# Altium PCB STM32F407VG_Pcb.PcbDoc
Units mil, origin at the board's own origin, x right, y up, seen from the top; angles counter-clockwise.
Board outline 6000 x 4000 mil, 2 copper layers (Top Layer, Bottom Layer); 121 components, 89 nets, 231 pads, 0 vias.
Unrouted connection lines stored in the file: 3.
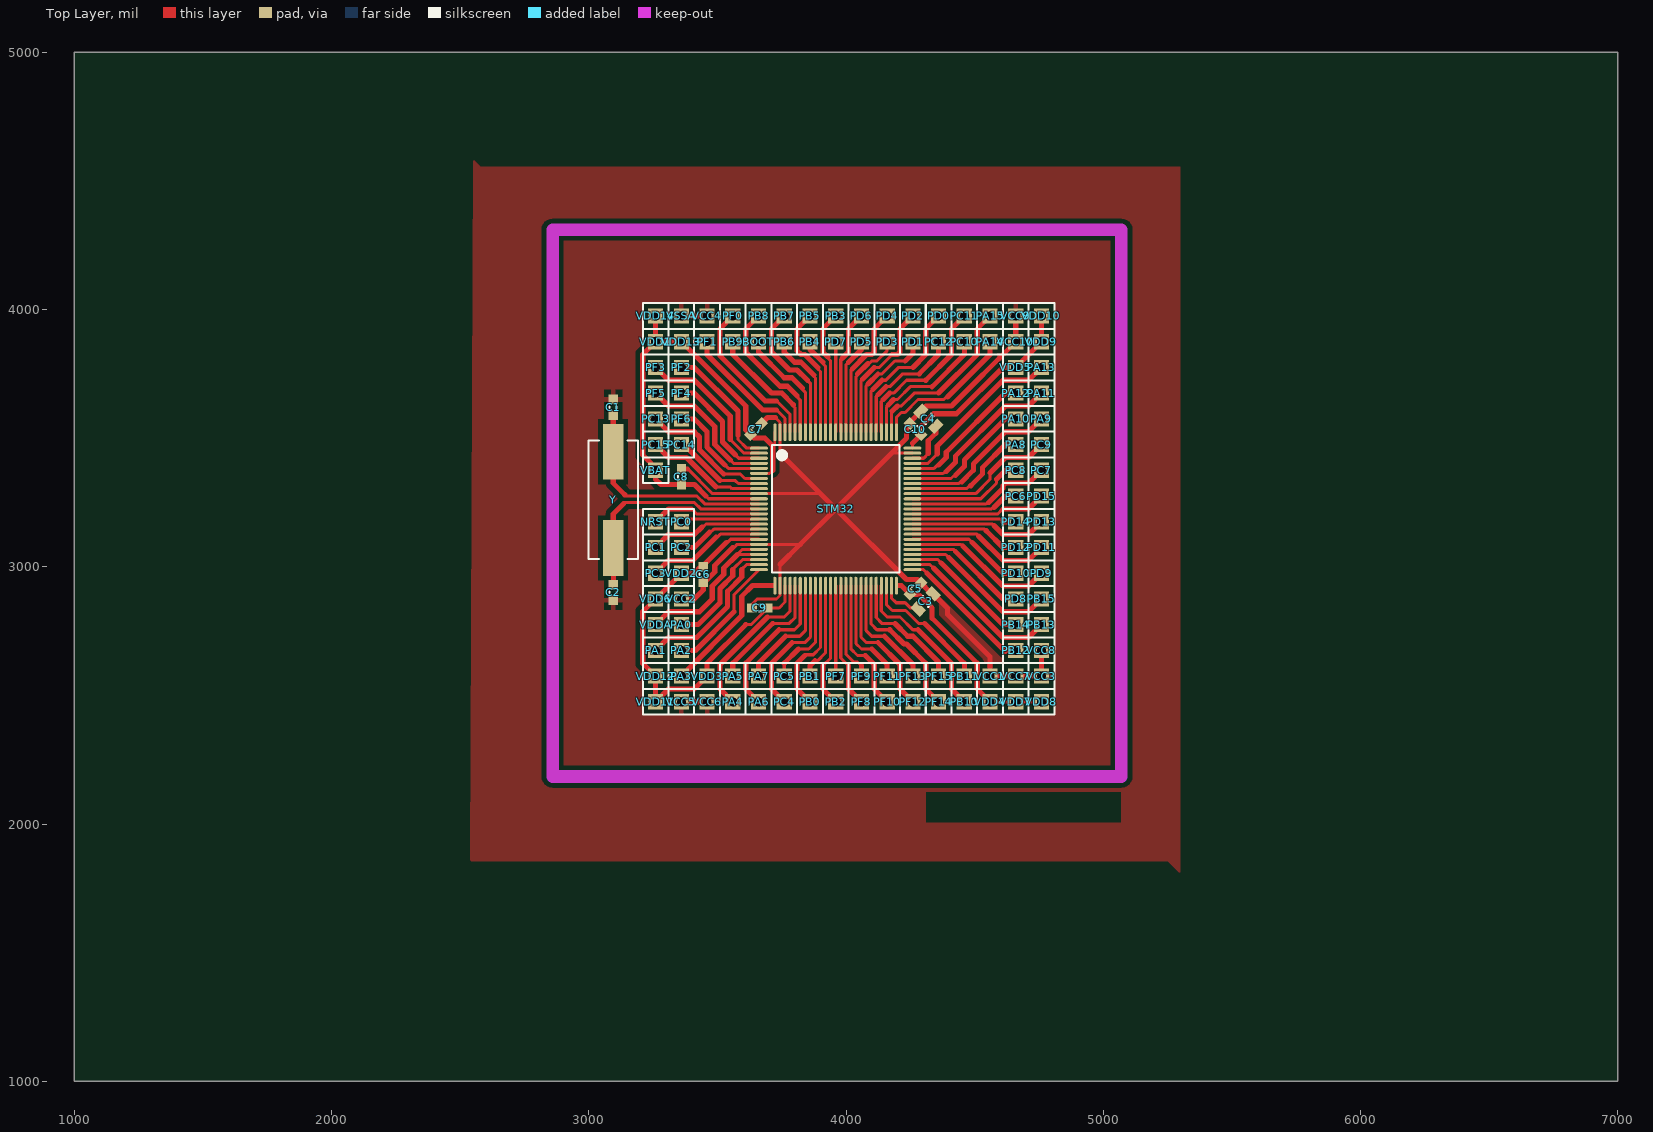
[diagram p0: Top Layer view]
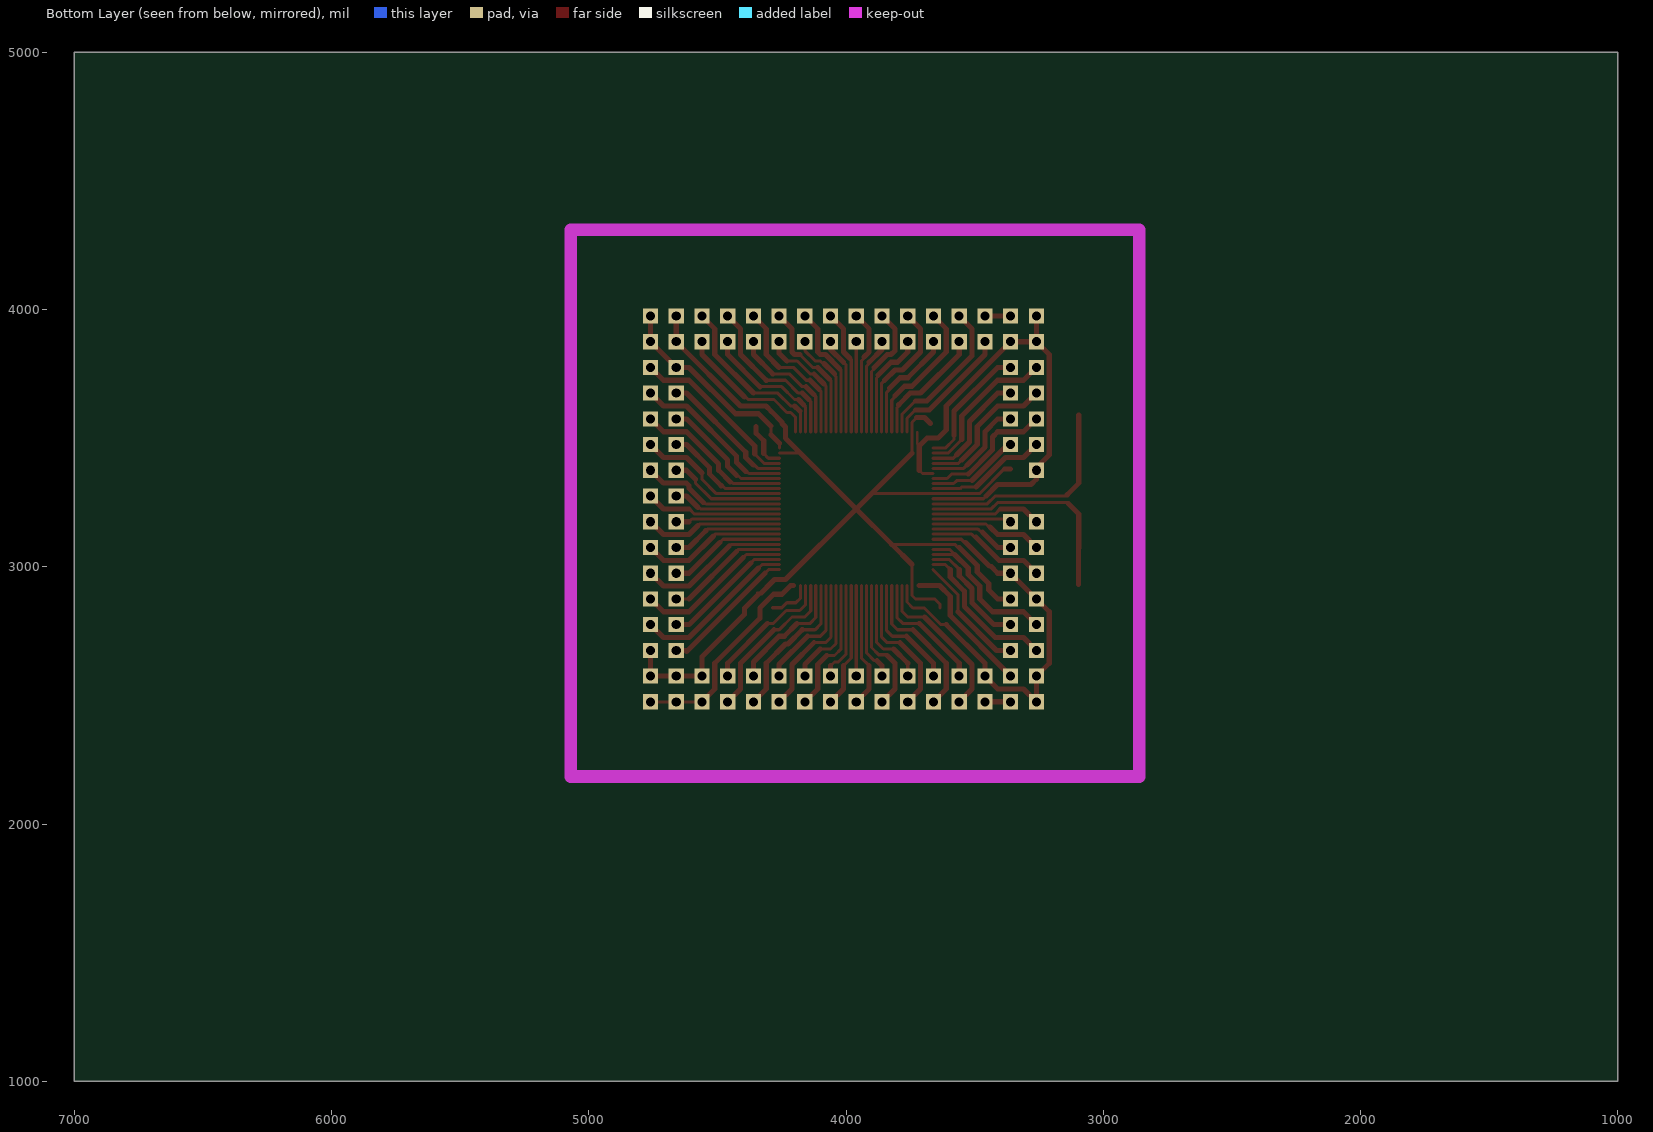
[diagram p1: Bottom Layer view, seen from below]

## Layer stack, top to bottom
Top Layer: signal copper 1.4
Dielectric: dielectric 12.6, FR-4, Dk 4.8
Bottom Layer: signal copper 1.4

## Board outline
1000,1000 7000,1000 7000,5000 1000,5000

## Design rules (kind name [scope] priority, off if disabled: settings)
Clearance [All] p1: gap=7
PlaneConnect [All] p1: planeconnectstyle=Relief reliefexpansion=20 reliefentries=4 reliefconductorwidth=20 reliefairgap=10
PolygonConnect [All] p1: connectstyle=Relief reliefconductorwidth=20 reliefentries=4 polygonreliefangle="90 Angle"
RoutingVias [All] p1: holewidth=28 width=50 viastyle="Through Hole" minholewidth=28 minwidth=50 maxholewidth=28 maxwidth=50
SilkscreenOverComponentPads [All] p1: minsilkscreentomaskgap=10
SolderMaskExpansion [All] p1: expansion=4
Width [All] p1: maxlimit=30 minlimit=10 preferedwidth=12
26 further rules are at their usual default settings.

## Components (designator, comment, footprint, x,y, rotation, side; value= is the part's Value field where it differs from the comment)
BOOT "Header 1" HDR1X1 3660,3875 r90 top
C1 "Cap" 0603 3095,3620 r90 top
C2 "Cap" 0603 3095,2900 r270 top
C3 "2.2uf" 0805 4310,2865 r45 top
C4 "2.2uf" 0805 4320,3575 r135 top
C5 "Cap" 0603 4270,2915 r45 top
C6 "Cap" 0603 3445,2970 r270 top
C7 "Cap" 0603 3650,3535 r45 top
C8 "Cap" 0603 3360,3350 r90 top
C9 "Cap" 0603 3665,2840 r180 top
C10 "Cap" 0603 4270,3535 r135 top
NRST "Header 1" HDR1X1 3260,3175 r90 top
PA0 "Header 1" HDR1X1 3360,2775 r0 top
PA1 "Header 1" HDR1X1 3260,2675 r0 top
PA2 "Header 1" HDR1X1 3360,2675 r0 top
PA3 "Header 1" HDR1X1 3360,2575 r0 top
PA4 "Header 1" HDR1X1 3560,2475 r0 top
PA5 "Header 1" HDR1X1 3560,2575 r0 top
PA6 "Header 1" HDR1X1 3660,2475 r0 top
PA7 "Header 1" HDR1X1 3660,2575 r0 top
PA8 "Header 1" HDR1X1 4660,3475 r0 top
PA9 "Header 1" HDR1X1 4760,3575 r0 top
PA10 "Header 1" HDR1X1 4660,3575 r90 top
PA11 "Header 1" HDR1X1 4760,3675 r90 top
PA12 "Header 1" HDR1X1 4660,3675 r90 top
PA13 "Header 1" HDR1X1 4760,3775 r90 top
PA14 "Header 1" HDR1X1 4560,3875 r90 top
PA15 "Header 1" HDR1X1 4560,3975 r90 top
PB0 "Header 1" HDR1X1 3860,2475 r0 top
PB1 "Header 1" HDR1X1 3860,2575 r0 top
PB2 "Header 1" HDR1X1 3960,2475 r0 top
PB3 "Header 1" HDR1X1 3960,3975 r0 top
PB4 "Header 1" HDR1X1 3860,3875 r0 top
PB5 "Header 1" HDR1X1 3860,3975 r0 top
PB6 "Header 1" HDR1X1 3760,3875 r0 top
PB7 "Header 1" HDR1X1 3760,3975 r0 top
PB8 "Header 1" HDR1X1 3660,3975 r0 top
PB9 "Header 1" HDR1X1 3560,3875 r0 top
PB10 "Header 1" HDR1X1 4460,2475 r90 top
PB11 "Header 1" HDR1X1 4460,2575 r90 top
PB12 "Header 1" HDR1X1 4660,2675 r90 top
PB13 "Header 1" HDR1X1 4760,2775 r90 top
PB14 "Header 1" HDR1X1 4660,2775 r90 top
PB15 "Header 1" HDR1X1 4760,2875 r90 top
PC0 "Header 1" HDR1X1 3360,3175 r0 top
PC1 "Header 1" HDR1X1 3260,3075 r0 top
PC2 "Header 1" HDR1X1 3360,3075 r0 top
PC3 "Header 1" HDR1X1 3260,2975 r0 top
PC4 "Header 1" HDR1X1 3760,2475 r0 top
PC5 "Header 1" HDR1X1 3760,2575 r0 top
PC6 "Header 1" HDR1X1 4660,3275 r0 top
PC7 "Header 1" HDR1X1 4760,3375 r0 top
PC8 "Header 1" HDR1X1 4660,3375 r0 top
PC9 "Header 1" HDR1X1 4760,3475 r0 top
PC10 "Header 1" HDR1X1 4460,3875 r90 top
PC11 "Header 1" HDR1X1 4460,3975 r90 top
PC12 "Header 1" HDR1X1 4360,3875 r90 top
PC13 "Header 1" HDR1X1 3260,3575 r90 top
PC14 "Header 1" HDR1X1 3360,3475 r90 top
PC15 "Header 1" HDR1X1 3260,3475 r90 top
PD0 "Header 1" HDR1X1 4360,3975 r0 top
PD1 "Header 1" HDR1X1 4260,3875 r0 top
PD2 "Header 1" HDR1X1 4260,3975 r0 top
PD3 "Header 1" HDR1X1 4160,3875 r0 top
PD4 "Header 1" HDR1X1 4160,3975 r0 top
PD5 "Header 1" HDR1X1 4060,3875 r0 top
PD6 "Header 1" HDR1X1 4060,3975 r0 top
PD7 "Header 1" HDR1X1 3960,3875 r0 top
PD8 "Header 1" HDR1X1 4660,2875 r0 top
PD9 "Header 1" HDR1X1 4760,2975 r0 top
PD10 "Header 1" HDR1X1 4660,2975 r90 top
PD11 "Header 1" HDR1X1 4760,3075 r90 top
PD12 "Header 1" HDR1X1 4660,3075 r90 top
PD13 "Header 1" HDR1X1 4760,3175 r90 top
PD14 "Header 1" HDR1X1 4660,3175 r90 top
PD15 "Header 1" HDR1X1 4760,3275 r90 top
PF0 "Header 1" HDR1X1 3560,3975 r0 top
PF1 "Header 1" HDR1X1 3460,3875 r0 top
PF2 "Header 1" HDR1X1 3360,3775 r0 top
PF3 "Header 1" HDR1X1 3260,3775 r0 top
PF4 "Header 1" HDR1X1 3360,3675 r0 top
PF5 "Header 1" HDR1X1 3260,3675 r0 top
PF6 "Header 1" HDR1X1 3360,3575 r0 top
PF7 "Header 1" HDR1X1 3960,2575 r0 top
PF8 "Header 1" HDR1X1 4060,2475 r0 top
PF9 "Header 1" HDR1X1 4060,2575 r0 top
PF10 "Header 1" HDR1X1 4160,2475 r90 top
PF11 "Header 1" HDR1X1 4160,2575 r90 top
PF12 "Header 1" HDR1X1 4260,2475 r90 top
PF13 "Header 1" HDR1X1 4260,2575 r90 top
PF14 "Header 1" HDR1X1 4360,2475 r90 top
PF15 "Header 1" HDR1X1 4360,2575 r90 top
STM32 "STM32F407V" STM32F_100 3960,3225 r0 top
VBAT "Header 1" HDR1X1 3260,3375 r90 top
VCC1 "Header 1" HDR1X1 4560,2575 r90 top
VCC2 "Header 1" HDR1X1 3360,2875 r90 top
VCC3 "Header 1" HDR1X1 4760,2575 r180 top
VCC4 "Header 1" HDR1X1 3460,3975 r180 top
VCC5 "Header 1" HDR1X1 3360,2475 r180 top
VCC6 "Header 1" HDR1X1 3460,2475 r180 top
VCC7 "Header 1" HDR1X1 4660,2575 r90 top
VCC8 "Header 1" HDR1X1 4760,2675 r90 top
VCC9 "Header 1" HDR1X1 4660,3975 r90 top
VCC10 "Header 1" HDR1X1 4660,3875 r90 top
VDD1 "Header 1" HDR1X1 3260,3875 r90 top
VDD2 "Header 1" HDR1X1 3360,2975 r90 top
VDD3 "Header 1" HDR1X1 3460,2575 r90 top
VDD4 "Header 1" HDR1X1 4560,2475 r90 top
VDD5 "Header 1" HDR1X1 4660,3775 r90 top
VDD6 "Header 1" HDR1X1 3260,2875 r90 top
VDD7 "Header 1" HDR1X1 4660,2475 r90 top
VDD8 "Header 1" HDR1X1 4760,2475 r90 top
VDD9 "Header 1" HDR1X1 4760,3875 r90 top
VDD10 "Header 1" HDR1X1 4760,3975 r90 top
VDD11 "Header 1" HDR1X1 3260,2475 r90 top
VDD12 "Header 1" HDR1X1 3260,2575 r90 top
VDD13 "Header 1" HDR1X1 3360,3875 r90 top
VDD14 "Header 1" HDR1X1 3260,3975 r90 top
VDDA "Header 1" HDR1X1 3260,2775 r90 top
VSSA "Header 1" HDR1X1 3360,3975 r90 top
Y "XTAL" XTAL_SND 3095,3260 r90 top

## Footprints (in the part's own frame and the unit in brackets; to place one, negate y for a bottom-side part, rotate by r counter-clockwise, add the part's x,y. Pads: shape width x height; smd on the part's side, far side on the other; paste and mask are expansions set on the pad)
0603 [mm] "Chip Capacitor, 2-Leads, Body 1.6x0.8mm, IPC Medium Density"
  rect 0.95x0.9 smd: 1(-0.775,0) 2(0.775,0)
  silkscreen extent -0.1,-0.35 0.1,0.35, body extent -0.85,-0.45 0.85,0.45, height 0.8
0805 [mm] "Chip Inductor, 2-Leads, Body 2.0x1.2mm, IPC Medium Density"
  rect 0.9x1.3 smd: 1(-1.05,0) 2(1.05,0)
  silkscreen extent -0.2,-0.55 0.2,0.55, body extent -1,-0.6 1,0.6, height 0.5
HDR1X1 [mm] "Connector; Header; 2 Position"
  rect 1.5x1.5 hole 0.9: 1(0,0)
  silkscreen extent -1.27,-1.27 1.27,1.27
STM32F_100 [mm] "TSQFP, 100-Leads, Body 16.2x16.2mm (max), Pitch 0.50mm, IPC Medium Density"
  oval 1.75x0.3 smd: 1(-7.575,6) 2(-7.575,5.5) 3(-7.575,5) 4(-7.575,4.5) 5(-7.575,4) 6(-7.575,3.5) 7(-7.575,3) 8(-7.575,2.5) 9(-7.575,2) 10(-7.575,1.5) 11(-7.575,1) 12(-7.575,0.5) 13(-7.575,0) 14(-7.575,-0.5) 15(-7.575,-1) 16(-7.575,-1.5) 17(-7.575,-2) 18(-7.575,-2.5) 19(-7.575,-3) 20(-7.575,-3.5) 21(-7.575,-4) 22(-7.575,-4.5) 23(-7.575,-5) 24(-7.575,-5.5) 25(-7.575,-6) 51(7.575,-6) 52(7.575,-5.5) 53(7.575,-5) 54(7.575,-4.5) 55(7.575,-4) 56(7.575,-3.5) 57(7.575,-3) 58(7.575,-2.5) 59(7.575,-2) 60(7.575,-1.5) 61(7.575,-1) 62(7.575,-0.5) 63(7.575,0) 64(7.575,0.5) 65(7.575,1) 66(7.575,1.5) 67(7.575,2) 68(7.575,2.5) 69(7.575,3) 70(7.575,3.5) 71(7.575,4) 72(7.575,4.5) 73(7.575,5) 74(7.575,5.5) 75(7.575,6)
  oval 0.3x1.75 smd: 26(-6,-7.575) 27(-5.5,-7.575) 28(-5,-7.575) 29(-4.5,-7.575) 30(-4,-7.575) 31(-3.5,-7.575) 32(-3,-7.575) 33(-2.5,-7.575) 34(-2,-7.575) 35(-1.5,-7.575) 36(-1,-7.575) 37(-0.5,-7.575) 38(0,-7.575) 39(0.5,-7.575) 40(1,-7.575) 41(1.5,-7.575) 42(2,-7.575) 43(2.5,-7.575) 44(3,-7.575) 45(3.5,-7.575) 46(4,-7.575) 47(4.5,-7.575) 48(5,-7.575) 49(5.5,-7.575) 50(6,-7.575) 76(6,7.575) 77(5.5,7.575) 78(5,7.575) 79(4.5,7.575) 80(4,7.575) 81(3.5,7.575) 82(3,7.575) 83(2.5,7.575) 84(2,7.575) 85(1.5,7.575) 86(1,7.575) 87(0.5,7.575) 88(0,7.575) 89(-0.5,7.575) 90(-1,7.575) 91(-1.5,7.575) 92(-2,7.575) 93(-2.5,7.575) 94(-3,7.575) 95(-3.5,7.575) 96(-4,7.575) 97(-4.5,7.575) 98(-5,7.575) 99(-5.5,7.575) 100(-6,7.575)
  silkscreen extent -6.3,-6.3 6.3,6.3, body extent -7,-7 7,7, height 1.6
XTAL_SND [mm] "Molded Diode, 2-Leads, Body 11.4x4.7mm, IPC Medium Density"
  rect 5.5x2 smd: 1(-4.75,0) 2(4.75,0)
  silkscreen extent -5.85,-2.45 5.85,2.45, body extent -5.8,-2.4 5.8,2.4, height 4

## Part data
BOOT NRST PA0 PA1 PA2 PA3 PA4 PA5 PA6 PA7 PA8 PA9 PA10 PA11 PA12 PA13 PA14 PA15 PB0 PB1 PB2 PB3 PB4 PB5 PB6 PB7 PB8 PB9 PB10 PB11 PB12 PB13 PB14 PB15 PC0 PC1 PC2 PC3 PC4 PC5 PC6 PC7 PC8 PC9 PC10 PC11 PC12 PC13 PC14 PC15 PD0 PD1 PD2 PD3 PD4 PD5 PD6 PD7 PD8 PD9 PD10 PD11 PD12 PD13 PD14 PD15 PF0 PF1 PF2 PF3 PF4 PF5 PF6 PF7 PF8 PF9 PF10 PF11 PF12 PF13 PF14 PF15 VBAT VCC1 VCC2 VCC3 VCC4 VCC5 VCC6 VCC7 VCC8 VCC9 VCC10 VDD1 VDD2 VDD3 VDD4 VDD5 VDD6 VDD7 VDD8 VDD9 VDD10 VDD11 VDD12 VDD13 VDD14 VDDA VSSA: "Header, 1-Pin"
C1 C2 C5 C6 C7 C8 C9 C10: "Capacitor"
C3 C4: library part "Cap Pol2", "Polarized Capacitor (Axial)"
STM32: "MCU"
Y: "Crystal Oscillator"

## Nets (pads, with @x,y where several pads share a name; then routed paths per layer and width w, separated by ;. In a path a pad name is that pad's centre, name@x,y a point inside that pad or via, vN(x,y) a via of type N, cw(c..) or ccw(c..) an arc to the next point about the centre after c; other vN are vias at no path point)
3V3: C5.1 C6.1 C7.1 C8.1 C9.1 C10.1 STM32.6 STM32.11 STM32.19 STM32.28 STM32.50 STM32.75 STM32.100 VBAT.1 VDD1.1 VDD2.1 VDD3.1 VDD4.1 VDD5.1 VDD6.1 VDD7.1 VDD8.1 VDD9.1 VDD10.1 VDD11.1 VDD12.1 VDD13.1 VDD14.1 | length 5317.2
  Top Layer w10: 3715,3470 3723.78,3478.78 STM32.100
  Top Layer w12: VBAT.1 VBAT.1@3260,3385 ; C6.1@3435.51,3000.51 C6.1 ; 3455,3275 3465.63,3264.37 STM32.11 ; 3540,3095 3551.89,3106.89 STM32.19 ; 3610,2775 3630.51,2775 C9.1 3740,2840 3763.15,2863.15 STM32.28 ; STM32.6 3702.8,3362.8 3715,3375 ; STM32.75 4258.23,3480.08 ; C10.1 4291.58,3546.58 ; VDD4.1 VDD7.1 VDD8.1
  Top Layer w20: VBAT.1 3260,3340 3280.51,3319.49 C8.1 3410.51,3319.49 3455,3275 ; VBAT.1@3260,3385 3210,3435 3210,3825 VDD1.1 ; VDD14.1 VDD1.1 ; C6.1@3435.51,3000.51 3410,2975 VDD2.1 VDD6.1 3210,2825 3210,2625 VDD12.1 VDD11.1 3310,2525 3410,2525 VDD3.1 3460,2625 3610,2775 ; C6.1@3442.76,3002.76 3535,3095 ; 3715,3375 3715,3470 3685,3500 3641.85,3500 C7.1 3610,3531.85 3610,3625 VDD13.1 VDD1.1 ; 4205,2926.77 4215.08,2926.77 C5.1 4281.58,2893.42 4335,2840 4335,2800 4510,2625 4510,2525 VDD4.1 ; 4258.23,3480.08 C10.1 ; 4291.58,3546.58 4340,3595 4430,3595 4610,3775 VDD5.1 VDD9.1 VDD10.1
BOOT: BOOT.1 STM32.94 | length 439.7
  Top Layer w12: 3830,3690 3841.89,3678.11 STM32.94
  Top Layer w20: BOOT.1 3660,3835 3760,3735 3790,3735 3830,3695
GND: C1.2 C2.2 C3.2 C4.2 C5.2 C6.2 C7.2 C8.2 C9.2 C10.2 STM32.10 STM32.20 STM32.27 STM32.74 STM32.99 VCC1.1 VCC2.1 VCC3.1 VCC4.1 VCC5.1 VCC6.1 VCC7.1 VCC8.1 VCC9.1 VCC10.1 VSSA.1 | length 4843.7
  Top Layer w10: C10.2 C10.2@4248.42,3561.89 ; C3.2@4328.92,2899.23 C3.2@4344.23,2899.23
  Top Layer w12: 3384.49,3380.51 3480.94,3284.06 STM32.10 3900.94,3284.06 ; 3565,3075 3577.2,3087.2 STM32.20 3822.2,3087.2 ; C9.2 3634.49,2854.49 3655,2875 3730,2875 3743.46,2888.46 STM32.27 3743.46,3008.46 ; 3725,3580 3743.46,3561.54 STM32.99 3743.46,3441.54 ; 4176.54,3441.54 STM32.74
  Top Layer w20: VCC5.1 VCC6.1 ; VCC2.1 3410,2875 3445,2910 3445,2934.49 3490,2979.49 3490,3005 3560,3075 ; C8.2 3384.49,3380.51 ; VSSA.1 VCC4.1 ; C7.2 3695,3580 3725,3580 ; 3743.46,3008.46 3822.2,3087.2 3960,3225 ; 3743.46,3441.54 3900.94,3284.06 3960,3225 ; C10.2 4235,3543.15 4235,3500 4176.54,3441.54 3960,3225 ; C10.2@4248.42,3561.89 C4.2 4311.54,3625 4410,3625 VCC10.1 VCC9.1 ; C3.2@4328.92,2899.23 C5.2 4278.15,2950 4235,2950 3960,3225 ; C3.2 4394.42,2839.04 4394.42,2815.58 4560,2650 VCC1.1 VCC7.1 VCC3.1 VCC8.1
NetC1_1: C1.1 STM32.12 Y.2 | length 858.2
  Top Layer w12: C1.1@3095,3588.98 3095.51,3589.49 C1.1@3095.51,3590 ; 3145,3275 3420,3275 3450.32,3244.68 STM32.12
  Top Layer w20: C1.1@3095,3588.98 Y.2 3095,3325 3140,3280
NetC2_1: C2.1 STM32.13 Y.1 | length 867.7
  Top Layer w12: 3135,3250 3410,3250 3435,3225 STM32.13
  Top Layer w20: Y.1 3095,3205 3135,3245 ; C2.1@3095.51,2930.51 Y.1@3095.51,3072.48
NetC3_1: C3.1 STM32.49 | length 173.2
  Top Layer w12: STM32.49 4176.54,2878.46 4195,2860 4230,2860 4249.23,2840.77 C3.1@4285.77,2840.77
NetC4_1: C4.1 STM32.73 | length 187.2
  Top Layer w12: STM32.73 4301.85,3421.85 4320,3440
  Top Layer w20: 4320,3440 4320,3490 4349.23,3519.23 C4.1
NRST: NRST.1 STM32.14 | length 430.6
  Top Layer w12: 3400,3225 3419.69,3205.31 STM32.14
  Top Layer w20: NRST.1 3310,3225 3400,3225
PA0: PA0.1 STM32.23 | length 453.5
  Top Layer w12: 3560,2990 3598.15,3028.15 STM32.23
  Top Layer w20: PA0.1 3425,2775 3510,2860 3510,2915 3560,2965 3560,2990
PA1: PA1.1 STM32.24 | length 592.6
  Top Layer w12: 3595,2990 3613.46,3008.46 STM32.24
  Top Layer w20: PA1.1 3310,2725 3420,2725 3540,2845 3540,2905 3595,2960 3595,2990
PA2: PA2.1 STM32.25 | length 471
  Top Layer w12: 3565,2825 3565,2892.01 STM32.25
  Top Layer w20: PA2.1 3415,2675 3565,2825
PA3: PA3.1 STM32.26 | length 544.6
  Top Layer w20: PA3.1 3595,2810 3595,2885 3636.77,2926.77 3715,2926.77
PA4: PA4.1 STM32.29 | length 623.6
  Top Layer w12: 3695,2805 3760,2805 3782.83,2827.83 STM32.29
  Top Layer w20: PA4.1 3510,2525 3510,2620 3695,2805
PA5: PA5.1 STM32.30 | length 490.3
  Top Layer w12: 3715,2780 3780,2780 3802.52,2802.52 STM32.30
  Top Layer w20: PA5.1 3560,2625 3715,2780
PA6: PA6.1 STM32.31 | length 595.5
  Top Layer w12: 3740,2755 3800,2755 3822.2,2777.2 STM32.31
  Top Layer w20: PA6.1 3610,2525 3610,2625 3740,2755
PA7: PA7.1 STM32.32 | length 459.3
  Top Layer w12: 3765,2730 3820,2730 3841.89,2751.89 STM32.32
  Top Layer w20: PA7.1 3660,2625 3765,2730
PA8: PA8.1 STM32.67 | length 482.4
  Top Layer w12: STM32.67 4468.74,3303.74 4480,3315
  Top Layer w20: 4485,3315 4530,3360 4530,3385 4620,3475 PA8.1
PA9: PA9.1 STM32.68 | length 615.6
  Top Layer w12: STM32.68 4438.43,3323.43 4445,3330
  Top Layer w20: 4450,3330 4495,3375 4495,3400 4620,3525 4710,3525 PA9.1
PA10: PA10.1 STM32.69 | length 507.5
  Top Layer w12: STM32.69 4408.11,3343.11 4420,3355
  Top Layer w20: 4425,3355 4460,3390 4460,3415 4620,3575 PA10.1
PA11: PA11.1 STM32.70 | length 640.7
  Top Layer w12: STM32.70 4377.8,3362.8 4385,3370
  Top Layer w20: 4390,3370 4425,3405 4425,3430 4620,3625 4710,3625 PA11.1
PA12: PA12.1 STM32.71 | length 529.7
  Top Layer w12: STM32.71 4342.48,3382.48 4355,3395
  Top Layer w20: 4360,3395 4390,3425 4390,3445 4620,3675 PA12.1
PA13: PA13.1 STM32.72 | length 674.7
  Top Layer w12: STM32.72 4318.73,3402.17 4355,3438.43
  Top Layer w20: 4355,3438.43 4355,3470 4610,3725 4710,3725 PA13.1
PA14: PA14.1 STM32.76 | length 567.7
  Top Layer w12: STM32.76 4196.22,3581.22 4215,3600 4230,3600 4280,3650 4380,3650 4390,3660
  Top Layer w20: 4395,3660 4560,3825 PA14.1
PA15: PA15.1 STM32.77 | length 675
  Top Layer w12: STM32.77 4176.54,3601.54 4180,3605 ; 4200,3625 4215,3625 4265,3675 4360,3675
  Top Layer w20: 4180,3605 4200,3625 ; 4360,3675 4510,3825 4510,3925 PA15.1
PB0: PB0.1 STM32.35 | length 527.7
  Top Layer w12: 3840,2655 3843,2658 3873,2658 3900.94,2685.94 STM32.35
  Top Layer w20: 3840,2655 3810,2625 3810,2525 PB0.1
PB1: PB1.1 STM32.36 | length 372.7
  Top Layer w12: 3890,2635 3920.63,2665.63 STM32.36
  Top Layer w20: PB1.1 3860,2615 3880,2635
PB2: PB2.1 STM32.37 | length 485
  Top Layer w12: 3910,2615 3940.32,2645.32 STM32.37
  Top Layer w20: 3910,2615 3910,2525 PB2.1
PB3: PB3.1 STM32.89 | length 480
  Top Layer w12: 3930,3810 3940.32,3799.68 STM32.89
  Top Layer w20: 3930,3815 3910,3835 3910,3925 PB3.1
PB4: PB4.1 STM32.90 | length 371.9
  Top Layer w12: 3860,3845 PB4.1 ; 3910,3790 3920.63,3779.37 STM32.90
  Top Layer w20: 3860,3845 3910,3795
PB5: PB5.1 STM32.91 | length 513.9
  Top Layer w12: 3890,3770 3900.94,3759.06 STM32.91
  Top Layer w20: PB5.1 3810,3925 3810,3840 3825,3825 3840,3825 3890,3775
PB6: PB6.1 STM32.92 | length 411.6
  Top Layer w12: 3875,3740 3881.26,3733.74 STM32.92
  Top Layer w20: PB6.1 3760,3835 3800,3795 3825,3795 3875,3745
PB7: PB7.1 STM32.93 | length 552.8
  Top Layer w12: 3850,3725 3861.57,3713.43 STM32.93
  Top Layer w20: PB7.1 3710,3925 3710,3835 3780,3765 3810,3765 3850,3725
PB8: PB8.1 STM32.95 | length 573
  Top Layer w12: 3810,3660 3822.2,3647.8 STM32.95
  Top Layer w20: PB8.1 3610,3925 3610,3835 3743,3702 3773,3702 3810,3665
PB9: PB9.1 STM32.96 | length 470.7
  Top Layer w12: 3795,3625 3802.52,3617.48 STM32.96
  Top Layer w20: PB9.1 3560,3825 3710,3675 3750,3675 3795,3630
PB10: PB10.1 STM32.47 | length 626.5
  Top Layer w12: STM32.47 4137.17,2827.83 4160,2805 4210,2805 4260,2755 4280,2755
  Top Layer w20: 4280,2755 4410,2625 4410,2525 PB10.1
PB11: PB11.1 STM32.48 | length 521.3
  Top Layer w12: STM32.48 4156.85,2853.15 4180,2830 4231.87,2830 4281.87,2780 4305,2780
  Top Layer w20: 4305,2780 4460,2625 PB11.1
PB12: PB12.1 STM32.51 | length 533.8
  Top Layer w12: STM32.51 4301.22,2988.78 4315,2975
  Top Layer w20: 4315,2975 4620,2670 ; 4620,2675 PB12.1
PB13: PB13.1 STM32.52 | length 639.9
  Top Layer w12: STM32.52 4326.54,3008.46 4340,2995
  Top Layer w20: 4340,2995 4610,2725 4710,2725 PB13.1
PB14: PB14.1 STM32.53 | length 506.6
  Top Layer w12: STM32.53 4356.85,3028.15 4370,3015
  Top Layer w20: 4370,3015 4610,2775 PB14.1
PB15: PB15.1 STM32.54 | length 614.8
  Top Layer w12: STM32.54 4387.17,3047.83 4400,3035
  Top Layer w20: 4400,3035 4610,2825 4710,2825 PB15.1
PC0: PC0.1 STM32.15 | length 306.2
  Top Layer w12: PC0.1 3370.63,3185.63 STM32.15
PC1: PC1.1 STM32.16 | length 434.4
  Top Layer w12: 3445,3155 3455.94,3165.94 STM32.16
  Top Layer w20: PC1.1 3310,3125 3410,3125 3440,3155
PC2: PC2.1 STM32.17 | length 326.3
  Top Layer w12: 3475,3135 3486.26,3146.26 STM32.17
  Top Layer w20: PC2.1 3410,3075 3470,3135
PC3: PC3.1 STM32.18 | length 459.6
  Top Layer w12: 3500,3115 3511.57,3126.57 STM32.18
  Top Layer w20: PC3.1 3310,3025 3405,3025 3495,3115
PC4: PC4.1 STM32.33 | length 564.6
  Top Layer w12: 3790,2705 3840,2705 3861.57,2726.57 STM32.33
  Top Layer w20: PC4.1 3710,2525 3710,2625 3790,2705
PC5: PC5.1 STM32.34 | length 425.4
  Top Layer w12: PC5.1 3760,2625 ; 3815,2680 3855,2680 3881.26,2706.26 STM32.34
  Top Layer w20: 3760,2625 3815,2680
PC6: PC6.1 STM32.63 | length 417.5
  Top Layer w12: STM32.63 4565,3225 4570,3230
  Top Layer w20: 4575,3230 4620,3275 PC6.1
PC7: PC7.1 STM32.64 | length 556.6
  Top Layer w12: STM32.64 4544.69,3244.68 4550,3250
  Top Layer w20: 4555,3250 4610,3305 4610,3315 4620,3325 4710,3325 PC7.1
PC8: PC8.1 STM32.65 | length 456.4
  Top Layer w12: STM32.65 4524.37,3264.37 4585,3325 4585,3340
  Top Layer w20: 4585,3340 4620,3375 PC8.1
PC9: PC9.1 STM32.66 | length 595.5
  Top Layer w12: STM32.66 4504.06,3284.06 4560,3340 4560,3365
  Top Layer w20: 4560,3365 4620,3425 4710,3425 PC9.1
PC10: PC10.1 STM32.78 | length 535.9
  Top Layer w12: STM32.78 4156.85,3621.85 4165,3630 ; 4185,3650 4200,3650 4250,3700 4335,3700
  Top Layer w20: 4165,3630 4185,3650 ; 4335,3700 4460,3825 PC10.1
PC11: PC11.1 STM32.79 | length 638.2
  Top Layer w12: STM32.79 4137.17,3642.17 4145,3650 ; 4170,3675 4185,3675 4235,3725 4310,3725
  Top Layer w20: 4145,3650 4170,3675 ; 4310,3725 4410,3825 4410,3925 PC11.1
PC12: PC12.1 STM32.80 | length 499.1
  Top Layer w12: STM32.80 4117.48,3662.48 4125,3670 ; 4155,3700 4170,3700 4220,3750 4285,3750
  Top Layer w20: 4125,3670 4155,3700 ; 4285,3750 4360,3825 PC12.1
PC13: PC13.1 STM32.7 | length 527.1
  Top Layer w12: 3525,3360 3590,3360 3606.89,3343.11 STM32.7
  Top Layer w20: PC13.1 3310,3525 3410,3525 3430,3505 3430,3455 3525,3360
PC14: PC14.1 STM32.8 | length 364.6
  Top Layer w12: PC14.1 PC14.1@3370,3475 ; 3510,3335 3570,3335 3581.57,3323.43 STM32.8
  Top Layer w20: PC14.1@3370,3475 3510,3335
PC15: PC15.1 STM32.9 | length 472.7
  Top Layer w12: 3495,3310 3550,3310 3556.26,3303.74 STM32.9
  Top Layer w20: PC15.1 3310,3425 3380,3425 3495,3310
PD0: PD0.1 STM32.81 | length 601.4
  Top Layer w12: STM32.81 4097.8,3682.8 4105,3690 ; 4140,3725 4155,3725 4205,3775 4260,3775
  Top Layer w20: 4105,3690 4140,3725 ; 4260,3775 4310,3825 4310,3925 PD0.1
PD1: PD1.1 STM32.82 | length 459.3
  Top Layer w12: STM32.82 4078.11,3703.11 4085,3710 ; 4125,3750 4140,3750 4190,3800 4230,3800
  Top Layer w20: 4085,3710 4125,3750 ; 4230,3800 4260,3830 PD1.1
PD2: PD2.1 STM32.83 | length 558.7
  Top Layer w12: STM32.83 4058.43,3723.43 4065,3730 ; 4110,3775 4130,3775 4180,3825
  Top Layer w20: 4065,3730 4110,3775 ; 4180,3825 4200,3825 4210,3835 4210,3925 PD2.1
PD3: PD3.1 STM32.84 | length 406.6
  Top Layer w12: STM32.84 4038.74,3738.74 4045,3745 ; 4090,3790 4100,3800 4120,3800 4160,3840 PD3.1
  Top Layer w20: 4045,3750 4085,3790
PD4: PD4.1 STM32.85 | length 521.9
  Top Layer w12: STM32.85 4019.06,3764.06 4025,3770
  Top Layer w20: 4025,3770 4080,3825 4100,3825 4110,3835 4110,3925 PD4.1
PD5: PD5.1 STM32.86 | length 376.9
  Top Layer w12: STM32.86 3999.37,3784.37 4010,3795 ; 4060,3845 PD5.1
  Top Layer w20: 4010,3795 4060,3845
PD6: PD6.1 STM32.87 | length 485
  Top Layer w12: STM32.87 3979.69,3804.69 3985,3810
  Top Layer w20: 3985,3810 4010,3835 4010,3925 PD6.1
PD7: PD7.1 STM32.88 | length 351.8
  Top Layer w12: STM32.88 PD7.1
PD8: PD8.1 STM32.55 | length 481.5
  Top Layer w12: STM32.55 4417.48,3067.52 4425,3060 ; 4610,2875 PD8.1
  Top Layer w20: 4425,3060 4610,2875
PD9: PD9.1 STM32.56 | length 589.7
  Top Layer w12: STM32.56 4447.8,3087.2 4455,3080
  Top Layer w20: 4455,3080 4610,2925 4710,2925 PD9.1
PD10: PD10.1 STM32.57 | length 456.4
  Top Layer w12: STM32.57 4478.11,3106.89 4490,3095
  Top Layer w20: 4490,3095 4610,2975 PD10.1
PD11: PD11.1 STM32.58 | length 564.6
  Top Layer w12: STM32.58 4508.43,3126.57 4515,3120
  Top Layer w20: 4515,3120 4610,3025 4710,3025 PD11.1
PD12: PD12.1 STM32.59 | length 431.3
  Top Layer w12: STM32.59 4538.74,3146.26 4545,3140
  Top Layer w20: 4545,3140 4610,3075 PD12.1
PD13: PD13.1 STM32.60 | length 539.4
  Top Layer w12: STM32.60 4569.06,3165.94 4575,3160
  Top Layer w20: 4575,3160 4610,3125 4710,3125 PD13.1
PD14: PD14.1 STM32.61 | length 406.2
  Top Layer w12: STM32.61 4599.37,3185.63 4610,3175
  Top Layer w20: 4610,3175 PD14.1
PD15: PD15.1 STM32.62 | length 530.6
  Top Layer w12: STM32.62 4590.31,3205.31 4610,3225
  Top Layer w20: 4610,3225 4710,3225 PD15.1
PE0: PF0.1 STM32.97 | length 611.9
  Top Layer w12: 3730,3645 3782.83,3592.17 STM32.97
  Top Layer w20: PF0.1 3510,3925 3510,3820 3685,3645 3730,3645
PE1: PF1.1 STM32.98 | length 509.6
  Top Layer w12: 3730,3610 3763.15,3576.85 STM32.98
  Top Layer w20: PF1.1 3460,3825 3675,3610 3730,3610
PE2: PF2.1 STM32.1 | length 496.2
  Top Layer w12: 3580,3510 3580,3495 3613.78,3461.22 STM32.1
  Top Layer w20: PF2.1 3410,3775 3580,3605 3580,3510
PE3: PF3.1 STM32.2 | length 593.3
  Top Layer w12: 3550,3495 3603.46,3441.54 STM32.2
  Top Layer w20: PF3.1 3310,3725 3411.11,3725 3550,3586.11 3550,3495
PE4: PF4.1 STM32.3 | length 453.5
  Top Layer w12: 3570,3435 3583.15,3421.85 STM32.3
  Top Layer w20: PF4.1 3410,3675 3520,3565 3520,3485 3570,3435
PE5: PF5.1 STM32.4 | length 555.8
  Top Layer w12: 3550,3415 3562.83,3402.17 STM32.4
  Top Layer w20: PF5.1 3310,3625 3410,3625 3490,3545 3490,3475 3550,3415
PE6: PF6.1 STM32.5 | length 416.7
  Top Layer w12: 3530,3395 3542.52,3382.48 STM32.5
  Top Layer w20: PF6.1 3410,3575 3460,3525 3460,3465 3530,3395
PE7: PF7.1 STM32.38 | length 351.8
  Top Layer w12: PF7.1 STM32.38
PE8: PF8.1 STM32.39 | length 485
  Top Layer w12: STM32.39 3979.69,2645.31 4010,2615
  Top Layer w20: 4010,2615 4010,2525 PF8.1
PE9: PF9.1 STM32.40 | length 385.7
  Top Layer w12: STM32.40 3999.37,2660.63 4030,2630 4045,2630 4060,2615
  Top Layer w20: PF9.1 4060,2615
PE10: PF10.1 STM32.41 | length 527.7
  Top Layer w12: STM32.41 4019.06,2680.94 4045,2655 4075,2655
  Top Layer w20: 4075,2655 4110,2620 4110,2525 PF10.1
PE11: PF11.1 STM32.42 | length 425.4
  Top Layer w12: STM32.42 4038.74,2701.26 4060,2680 4100,2680
  Top Layer w20: 4100,2680 4160,2620 PF11.1
PE12: PF12.1 STM32.43 | length 561.6
  Top Layer w12: STM32.43 4058.43,2726.57 4080,2705 4125,2705
  Top Layer w20: 4125,2705 4210,2620 4210,2525 PF12.1
PE13: PF13.1 STM32.44 | length 456.4
  Top Layer w12: STM32.44 4078.11,2751.89 4100,2730 4150,2730
  Top Layer w20: 4150,2730 4260,2620 PF13.1
PE14: PF14.1 STM32.45 | length 595.5
  Top Layer w12: STM32.45 4097.8,2777.2 4120,2755 4170,2755
  Top Layer w20: 4170,2755 4225,2700 4235,2700 4310,2625 4310,2525 PF14.1
PE15: PF15.1 STM32.46 | length 493.2
  Top Layer w12: STM32.46 4117.48,2802.52 4141,2779 4191,2779
  Top Layer w20: 4191,2779 4240,2730 4260,2730 4360,2630 PF15.1
VDDA: STM32.21 STM32.22 VDDA.1 | length 650.8
  Top Layer w12: STM32.22 3577.83,3047.83 3597.52,3067.52 STM32.21
  Top Layer w20: VDDA.1 3310,2825 3430,2825 3480,2875 3480,2925 3525,2970 3525,2995 3577.83,3047.83

## Polygon pours and split planes (outlines as drawn)
GND on Top Layer "Keep-Out Layer-No Net" (solid, pour order 2): 2550,4585 2580,4555 5300,4555 5300,1805 5355,1750 5250,1855 2540,1855

## Keep-outs
Keep-Out Layer:
  lines w50: 2860,2185 2860,4310 5070,4310 5070,2185 2860,2185
  text "STM32F407VGT" at 4340,2035 h60